# Altium PCB short-cal-board-1point2in.PcbDoc
Units mm, origin at the board's own origin, x right, y up, seen from the top; angles counter-clockwise.
Board outline 37 x 16 mm, 4 copper layers (Top Layer, Mid-Layer 1, Mid-Layer 2, Bottom Layer), stack 1.105 mm thick; 2 components, 1 nets, 10 pads, 150 vias.
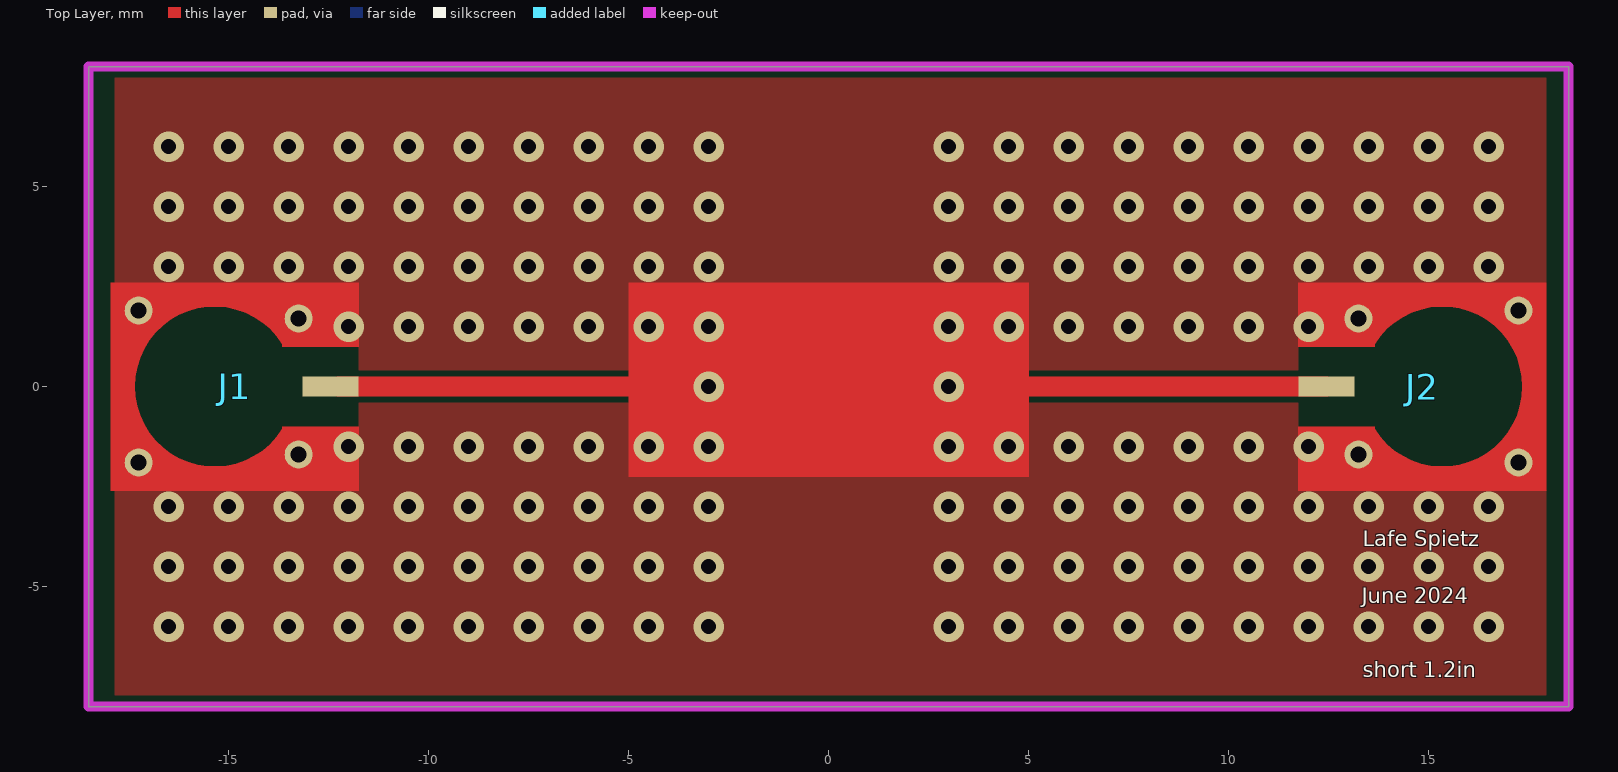
[diagram p0: Top Layer view]
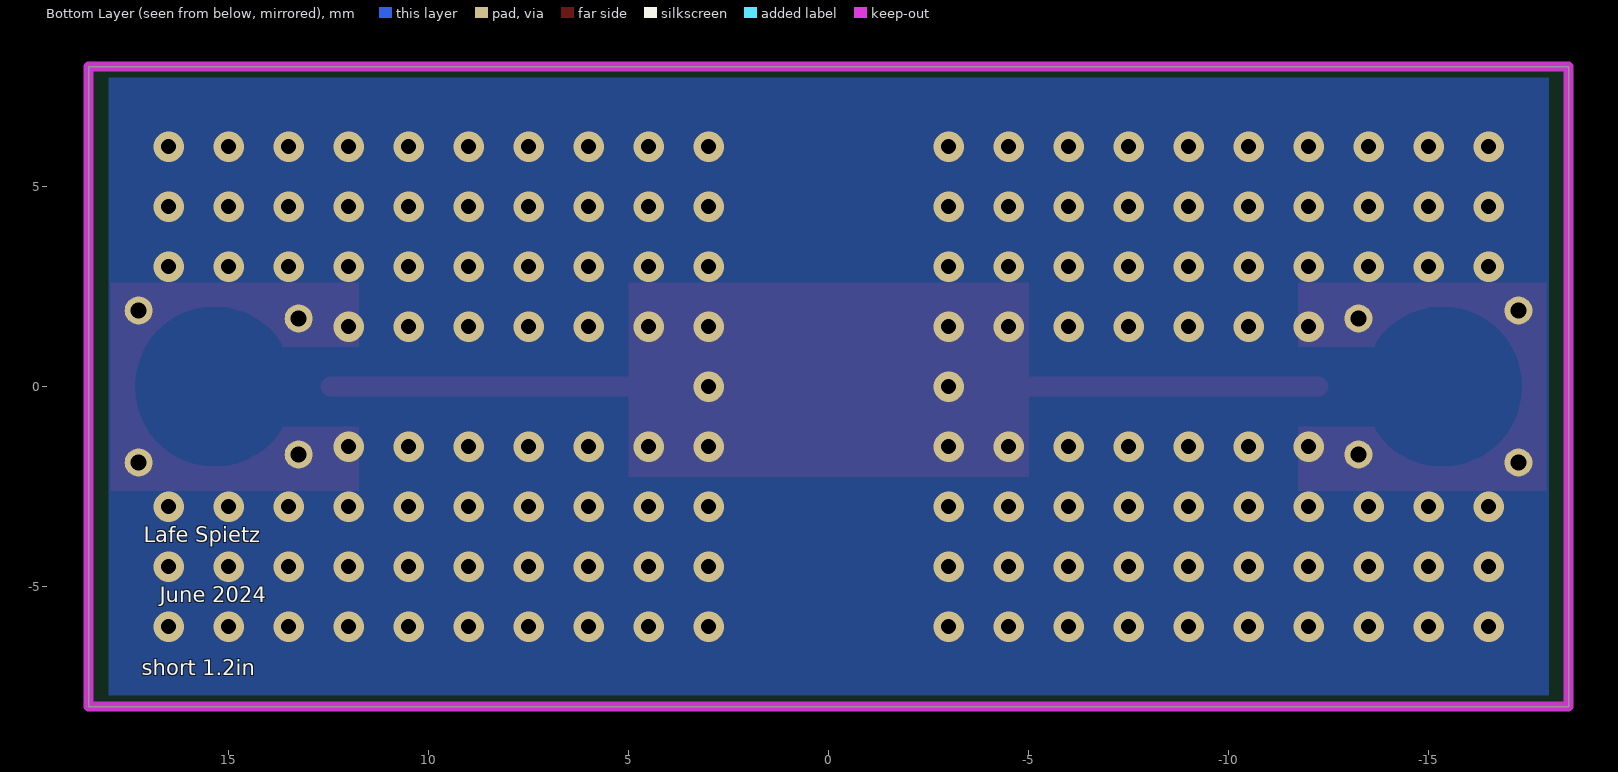
[diagram p1: Bottom Layer view, seen from below]
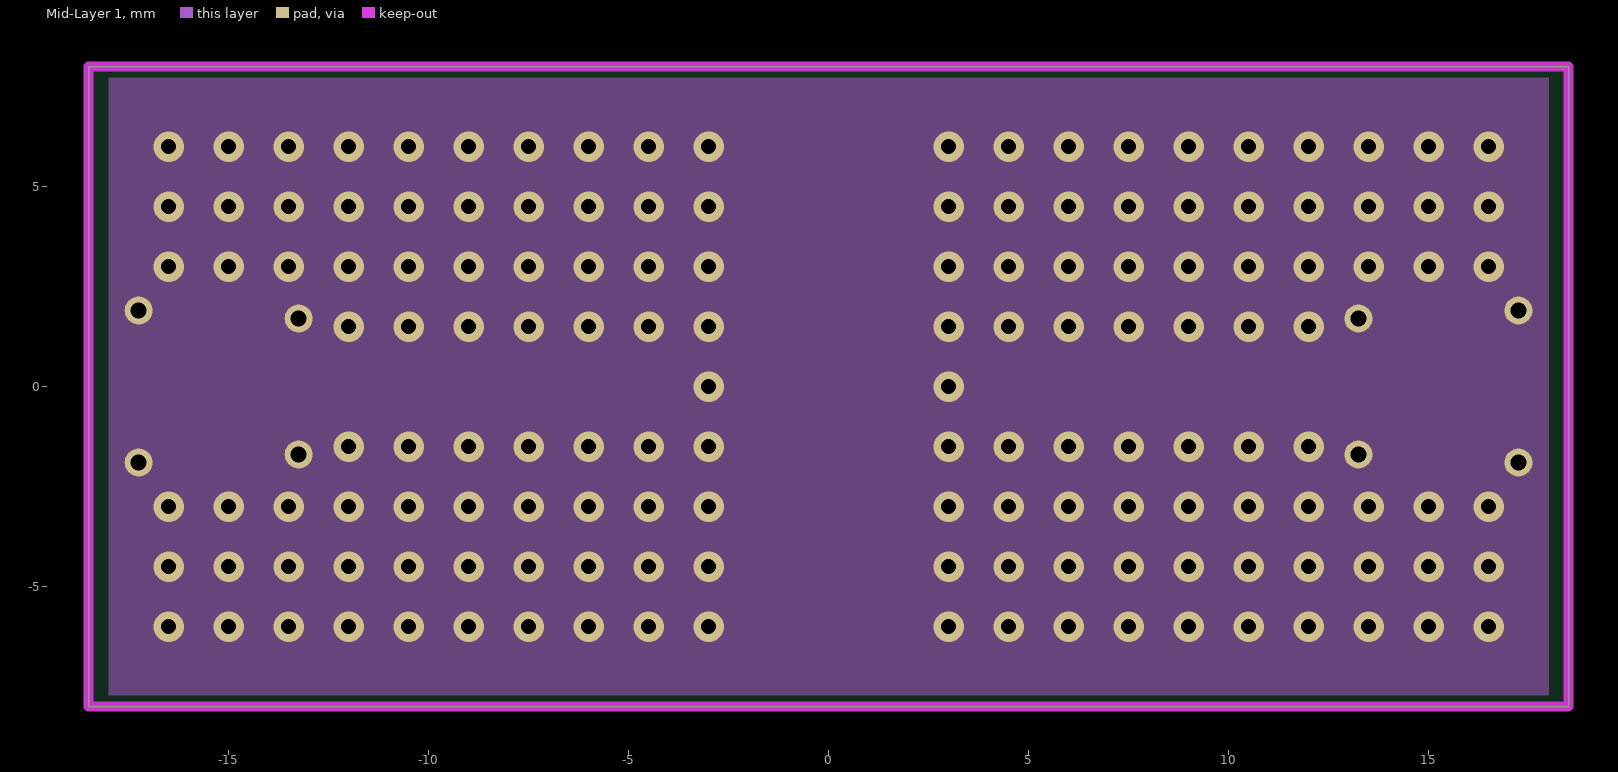
[diagram p2: Mid-Layer 1]
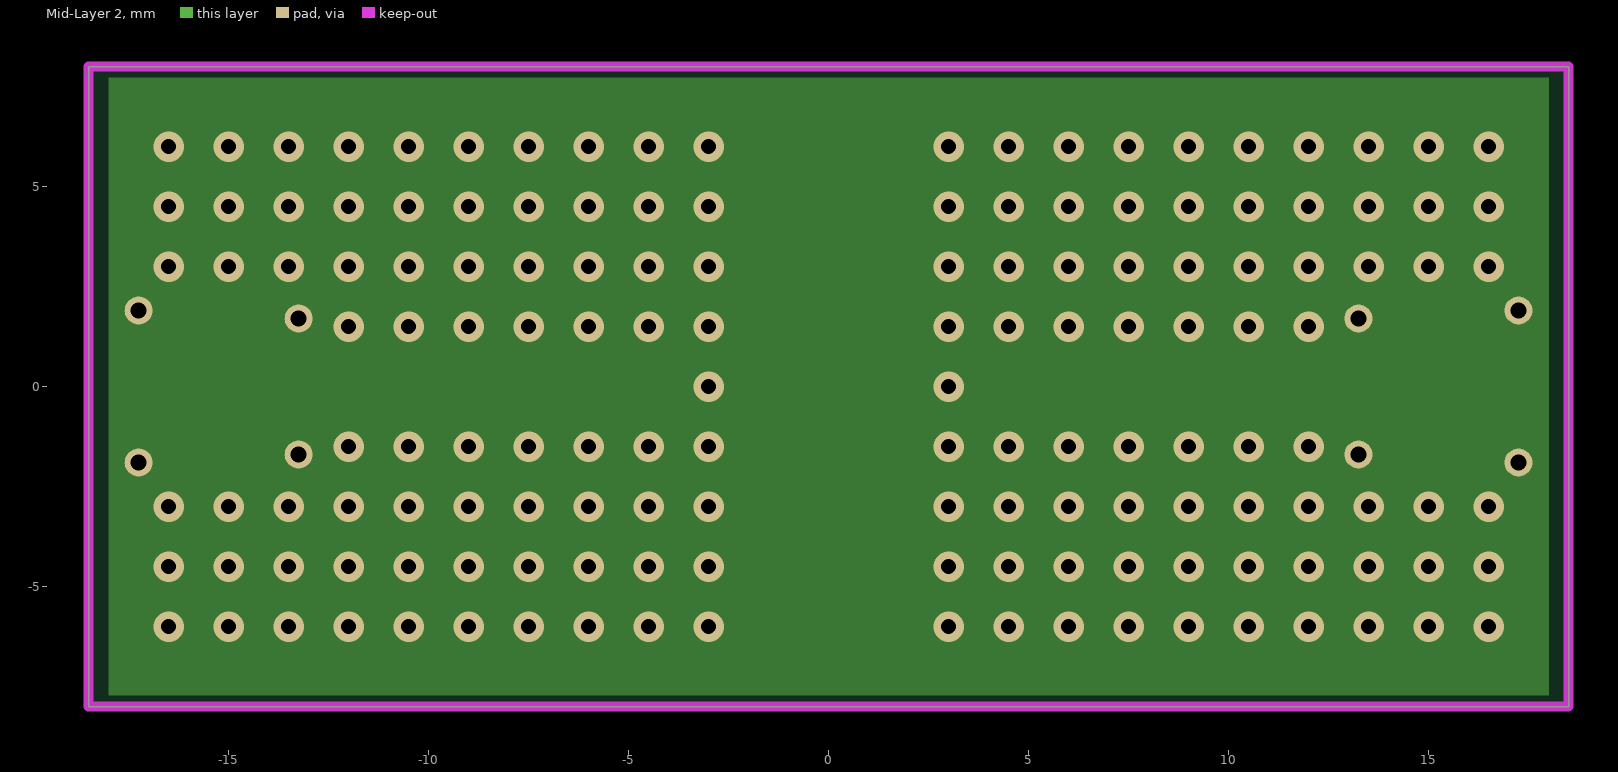
[diagram p3: Mid-Layer 2]

## Layer stack, top to bottom
Top Solder: solder mask 0.0254, SM-001, Dk 4
Top Layer: signal copper 0.035
Core1: dielectric 0.254, RO4350B, Dk 3.48
Mid-Layer 1: signal copper 0.035
Dielectric 1: prepreg 0.1778, PR7628, Dk 4.24
Dielectric 2: prepreg 0.1016, PR2116, Dk 4.17
Dielectric 3: prepreg 0.1778, PR7628, Dk 4.24
Mid-Layer 2: signal copper 0.035
Core2: dielectric 0.254, RO-4350B, Dk 3.48
Bottom Layer: signal copper 0.035
Bottom Solder: solder mask 0.0254, SM-001, Dk 4

## Board outline
-18.5,-8 -18.5,8 18.5,8 18.5,-8

## Design rules (kind name [scope] priority, off if disabled: settings)
Clearance [All] p1: gap=0.254 ignorepadtopadclearanceinfootprint=FALSE except(0: Track-Fill Track-Region Fill-Poly Poly-Poly Poly-Region Poly-Hole; 0.095: SMDPad-Region Region-Region; 0.1: Track-Track Track-SMDPad SMDPad-Poly Via-Poly; 0.152: Arc-Poly Track-Poly; 0.203: Arc-SMDPad; 0.229: SMDPad-SMDPad)
PolygonConnect [All] p1: connectstyle=Direct reliefconductorwidth=0.254 reliefentries=4 polygonreliefangle="90 Angle" airgapwidth=0.254
RoutingVias [All] p1: holewidth=0.381 width=0.635 viastyle="Through Hole" minholewidth=0.127 minwidth=0.254 maxholewidth=0.711 maxwidth=1.27
SolderMaskExpansion [All] p1: expansion=0.102 istentingtop=FALSE
Width [All] p1 off: maxlimit=0.55 minlimit=0.1 preferedwidth=0.254 toplayer_prefwidth=0.1 midlayer1_minwidth=0.254 midlayer1_maxwidth=0.254 midlayer2_minwidth=0.254 midlayer2_maxwidth=0.254 bottomlayer_minwidth=0.254 bottomlayer_maxwidth=0.254 minimp=50.000000 maximp=50.000000 favimp=50.000000
Width cpw-Z-1 [All] p2 off: maxlimit=0.5 minlimit=0.174 preferedwidth=0.254 toplayer_minwidth=0.323 toplayer_prefwidth=0.406 impedanceprofiledriven=TRUE impedanceprofileid={FF6547F1-1ACB-4B88-A69B-03F59FE56022} minimp=50.000000 maximp=50.000000 favimp=50.000000
30 further rules are at their usual default settings.

## Components (designator, comment, footprint, x,y, rotation, side; value= is the part's Value field where it differs from the comment)
J1 "SMP-straight-19S141-40ML5" rosenberger-19S141-40ML5 -15.347,0 r90 top
J2 "SMP-straight-19S141-40ML5" rosenberger-19S141-40ML5 15.347,0 r270 top

## Footprints (in the part's own frame and the unit in brackets; to place one, negate y for a bottom-side part, rotate by r counter-clockwise, add the part's x,y. Pads: shape width x height; smd on the part's side, far side on the other; paste and mask are expansions set on the pad)
rosenberger-19S141-40ML5 [mm]
  rect 0.5x1.4 smd: 1(0,-2.9)
  round 0.7 hole 0.4 mask+0: gnd(-1.9,1.9) gnd(-1.7,-2.1) gnd(1.7,-2.1) gnd(1.9,1.9)
  Top Layer region: -2.6,-3.6 -2.6,2.6 2.6,2.6 2.6,-3.6 1,-3.6 1,-1.696 1.06,-1.696 1.759,-0.951 2,0.042 1.718,1.024 0.988,1.739 0,2 -0.988,1.739 -1.718,1.024 -2,0.042 -1.759,-0.951 -1.06,-1.696 -1.06,-1.696 -1,-1.696 -1,-3.6
  body extent -2.5,-3.6 2.5,2.4, height 4.1

## Part data
J1 J2: "SMP Connector Plug, Male Pin 50Ohm Surface Mount Solder", Package=None, Supplier Part Number 1=476-19S201-40ML5, Availability="In Stock", Check_prices=https://www.snapeda.com/parts/853050232/Molex/view-part/?ref=eda, MF=Molex, MP=853050232, Price=None, Purchase-URL=https://pricing.snapeda.com/search/part/853050232/?ref=eda, SnapEDA_Link=https://www.snapeda.com/parts/853050232/Molex/view-part/?ref=snap, Supplier 1=Mouser

## Via types
v1: diameter 0.762, hole 0.381, Top Layer to Bottom Layer, 150 vias

## Nets (pads, with @x,y where several pads share a name; then routed paths per layer and width w, separated by ;. In a path a pad name is that pad's centre, name@x,y a point inside that pad or via, vN(x,y) a via of type N, cw(c..) or ccw(c..) an arc to the next point about the centre after c; other vN are vias at no path point)
GND: J1.1 J1.gnd J2.1 J2.gnd | length 24.6
  Top Layer w0.495: J1.1@-12.25,0 v1(-3,0) -1.2,0 5.19,0 ; 5.248,0 J2.1
  other v1: -16.5,-6 -15,-6 -13.5,-6 -12,-6 -10.5,-6 -9,-6 -7.5,-6 -6,-6 -4.5,-6 -3,-6 3,-6 4.5,-6 6,-6 7.5,-6 9,-6 10.5,-6 12,-6 13.5,-6 15,-6 16.5,-6 -16.5,-4.5 -15,-4.5 -13.5,-4.5 -12,-4.5 -10.5,-4.5 -9,-4.5 -7.5,-4.5 -6,-4.5 -4.5,-4.5 -3,-4.5 3,-4.5 4.5,-4.5 6,-4.5 7.5,-4.5 9,-4.5 10.5,-4.5 12,-4.5 13.5,-4.5 15,-4.5 16.5,-4.5 -16.5,-3 -15,-3 -13.5,-3 -12,-3 -10.5,-3 -9,-3 -7.5,-3 -6,-3 -4.5,-3 -3,-3 3,-3 4.5,-3 6,-3 7.5,-3 9,-3 10.5,-3 12,-3 13.5,-3 15,-3 16.5,-3 -12,-1.5 -10.5,-1.5 -9,-1.5 -7.5,-1.5 -6,-1.5 -4.5,-1.5 -3,-1.5 3,-1.5 4.5,-1.5 6,-1.5 7.5,-1.5 9,-1.5 10.5,-1.5 12,-1.5 3,0 -12,1.5 -10.5,1.5 -9,1.5 -7.5,1.5 -6,1.5 -4.5,1.5 -3,1.5 3,1.5 4.5,1.5 6,1.5 7.5,1.5 9,1.5 10.5,1.5 12,1.5 -16.5,3 -15,3 -13.5,3 -12,3 -10.5,3 -9,3 -7.5,3 -6,3 -4.5,3 -3,3 3,3 4.5,3 6,3 7.5,3 9,3 10.5,3 12,3 13.5,3 15,3 16.5,3 -16.5,4.5 -15,4.5 -13.5,4.5 -12,4.5 -10.5,4.5 -9,4.5 -7.5,4.5 -6,4.5 -4.5,4.5 -3,4.5 3,4.5 4.5,4.5 6,4.5 7.5,4.5 9,4.5 10.5,4.5 12,4.5 13.5,4.5 15,4.5 16.5,4.5 -16.5,6 -15,6 -13.5,6 -12,6 -10.5,6 -9,6 -7.5,6 -6,6 -4.5,6 -3,6 3,6 4.5,6 6,6 7.5,6 9,6 10.5,6 12,6 13.5,6 15,6 16.5,6

## Polygon pours and split planes (outlines as drawn)
GND on Top Layer "NONET_L02_P-001" (solid, pour order 10): 17.947,8 11,8 11,2.25 17.947,2.25
GND on Top Layer "NONET_L02_P-001" (solid, pour order 9): 17.947,-2.6 11,-2.6 11,-8 17.947,-8
GND on Top Layer "NONET_L02_P-001" (solid, pour order 8): -11.65,7.9 -17.85,7.9 -17.85,2.5 -11.65,2.5
GND on Top Layer "NONET_L02_P-001" (solid, pour order 6): -11.65,-2.6 -17.85,-2.6 -17.85,-8 -11.65,-8
GND on Top Layer "GND_L01_P000" (solid, pour order 0): -11.747,-8 11,-8 11,8 -11.747,8
GND on Top Layer "GND_L01_P005" (solid, pour order 5): 5,-2.6 11.747,-2.6 11.747,2.6 5,2.6
GND on Mid-Layer 1 "GND_L02_P001" (solid, pour order 1): -18,8 18,8 18,-8 -18,-8
GND on Mid-Layer 2 "GND_L03_P002" (solid, pour order 2): -18,8 18,8 18,-8 -18,-8
GND on Bottom Layer "GND_L04_P003" (solid, pour order 3): -18,8 18,8 18,-8 -18,-8
no net on Bottom Solder "NONET_L02_P-001" (solid): 18,8 -18,8 -18,-8 18,-8
no net on Top Solder "NONET_L02_P-001" (solid): -12.25,-3 -18.25,-3 -18.25,-8 -12.25,-8
no net on Top Solder "NONET_L02_P-001" (solid): -12.25,8 -18.25,8 -18.25,3 -12.25,3
no net on Top Solder "NONET_L02_P-001" (solid): 18,8 12,8 12,3 18,3
no net on Top Solder "NONET_L02_P-001" (solid): 12.975,-3 12,-3 12,-8 12.975,-8

## Keep-outs
Keep-Out Layer:
  lines w0.254: -18.5,-8 7,-8 18.5,-8 18.5,8 -18.5,8 -18.5,-8

## Other copper
Top Layer:
  rectangle net GND: 5,-0.249 5.379,0.248
  rectangle net GND: -5.5,-0.25 -4.8,0.25
  region net GND: -5,2.6 5,2.6 5,-2.25 -5,-2.25

## Silkscreen, mask and mechanical layers (free items; w line width, h text height)
Top Overlay:
  text "Lafe Spietz" at 13.352,-3.996 h0.38
  text "June 2024" at 13.327,-5.423 h0.38
  text "short 1.2in" at 13.352,-7.273 h0.38
Bottom Overlay:
  text "Lafe Spietz" at 17.123,-3.896 h0.38
  text "June 2024" at 16.723,-5.398 h0.38
  text "short 1.2in" at 17.173,-7.223 h0.38
Top Solder:
  rectangle: 9.978,0.407 11.75,2.057
  rectangle: 10.004,-2.061 11.75,-0.41
  rectangle: -11.659,0.402 -10.134,2.053
  rectangle: -11.654,-2.052 -10.129,-0.401
  rectangle: 10.598,0.974 12.5,8
  rectangle: 10.609,-8 12.5,-0.983
  rectangle: -12.5,0.982 -10.868,8
  rectangle: -12.5,-8 -10.858,-0.975
  rectangle: -11.25,-8 11,8
Bottom Solder:
  pour cut-out: 18.5,-8 18.5,-3.25 13,-3.25 13,-8